# Altium PCB MAIN.PcbDoc
Units mil, origin at the board's own origin, x right, y up, seen from the top; angles counter-clockwise.
Board outline 6000 x 4000 mil, 2 copper layers (Top Layer, Bottom Layer), stack 54.768 mil thick; 110 components, 125 nets, 555 pads, 0 vias.
Unrouted connection lines stored in the file: 226.
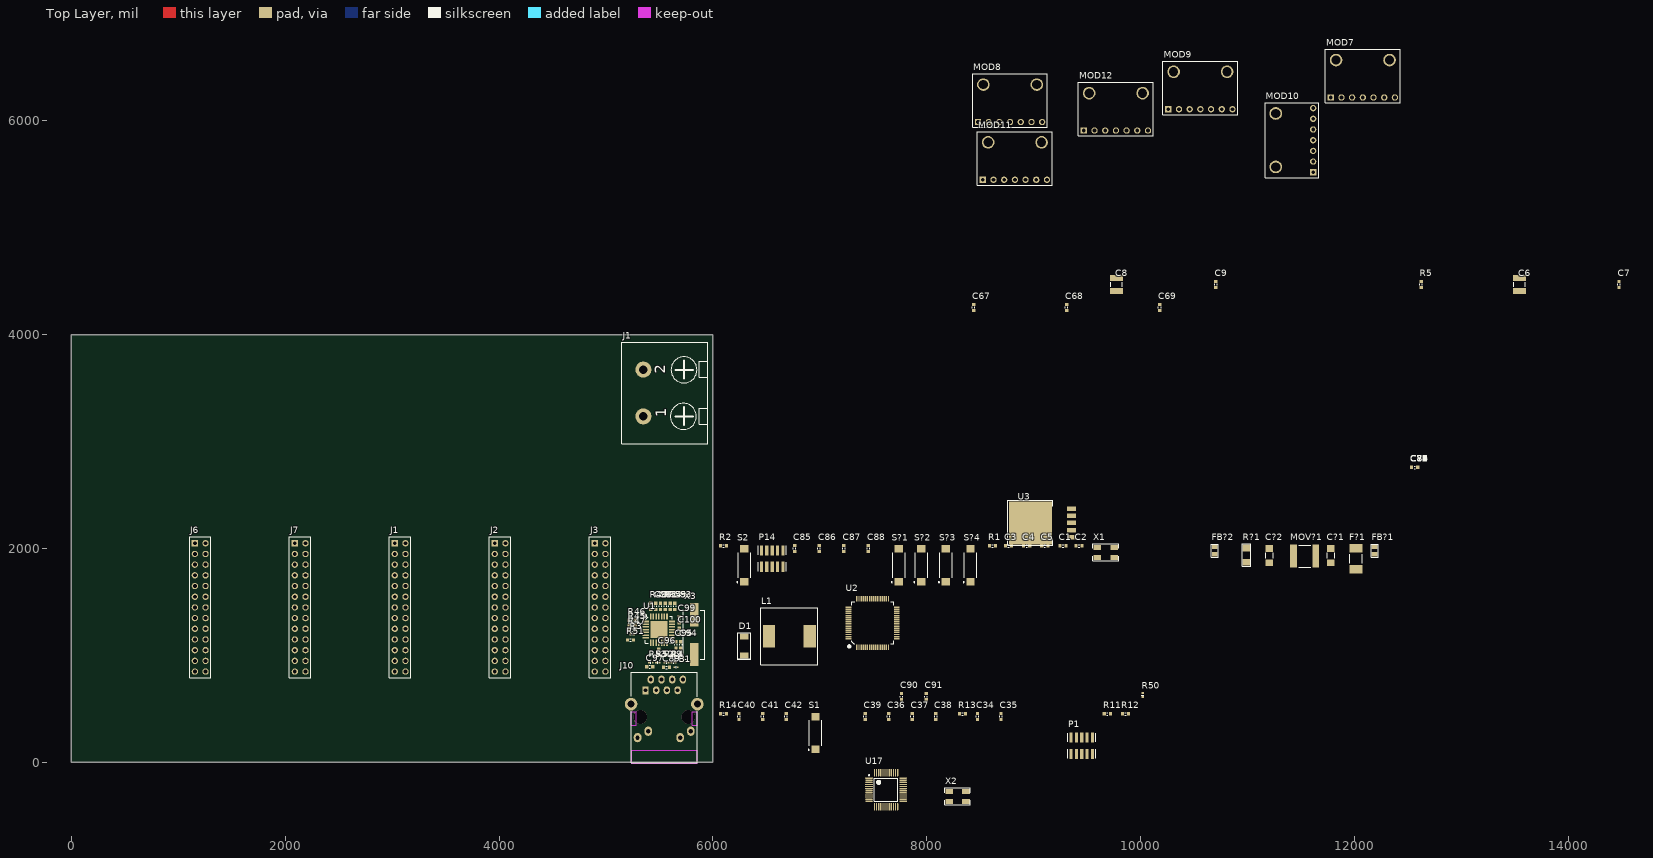
[diagram p0: Top Layer view]
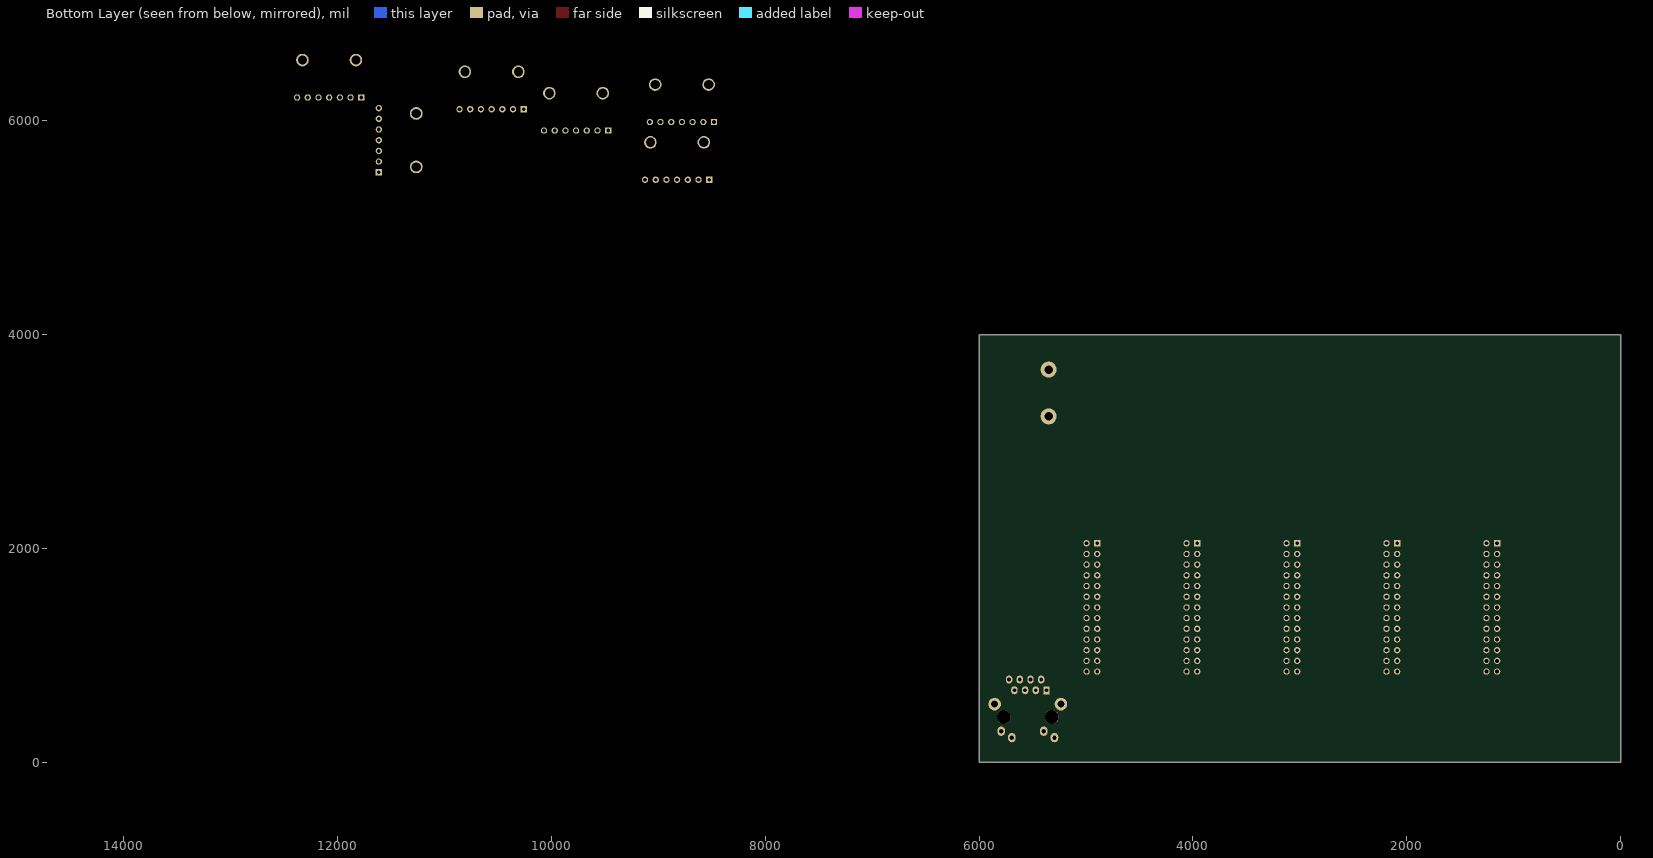
[diagram p1: Bottom Layer view, seen from below]

## Layer stack, top to bottom
Top Solder: solder mask 0.4, Solder Resist, Dk 3.5
Top Layer: signal copper 1.4
Dielectric 1: dielectric 51.9685, FR-4, Dk 4.8
Bottom Layer: signal copper 1.4
Bottom Solder: solder mask 0.4, Solder Resist, Dk 3.5

## Board outline
0,0 6000,0 6000,4000 0,4000

## Design rules (kind name [scope] priority, off if disabled: settings)
Clearance [All] p1: gap=10 ignorepadtopadclearanceinfootprint=FALSE except(0: Arc-Hole Track-Hole SMDPad-Hole THPad-Hole Via-Hole Fill-Hole Poly-Hole Region-Hole Text-Hole)
PolygonConnect [All] p1: connectstyle=Relief reliefconductorwidth=10 reliefentries=4 polygonreliefangle="90 Angle" airgapwidth=10
RoutingVias [All] p1: holewidth=28 width=50 viastyle="Through Hole" minholewidth=28 minwidth=50 maxholewidth=28 maxwidth=50
SolderMaskExpansion [All] p1: expansion=4 istentingtop=FALSE
Width [All] p1: maxlimit=10 minlimit=10 preferedwidth=10
30 further rules are at their usual default settings.

## Classes and differential pairs
component class Designator3: C73 C74 C75 MOD9
channel class VL53L0X: Designator1 Designator2 Designator4 Designator5 Designator6
component class Designator6: C82 C83 C84 MOD12
component class Designator5: C79 C80 C81 MOD11
component class Designator4: C76 C77 C78 MOD10
component class Designator1: C67 C68 C69 MOD7
component class Designator2: C70 C71 C72 MOD8
component class MAIN: C1 C2 C3 C4 C5 C85 C86 C87 C88 C?1 C?2 F?1 FB?1 FB?2 J1 J2 J3 J6 J7 MOV?1 P14 R1 R2 R?1 S2 S?1 S?2 S?3 S?4 U2 X1
component class Designator: C34 C35 C36 C37 C38 C39 C40 C41 C42 P1 R11 R12 R13 R14 S1 U17 X2

## Components (designator, comment, footprint, x,y, rotation, side; value= is the part's Value field where it differs from the comment)
C1 "Ceramic C0G" C_0603_1608 9275,2025 r0 top value=22pF (schematic designator C19)
C2 "Ceramic C0G" C_0603_1608 9425,2025 r0 top value=22pF (schematic designator C20)
C3 "Ceramic X5R" C_0603_1608 8765,2025 r0 top value=4.7uF (schematic designator C21)
C4 "Ceramic X7R" C_0603_1608 8935,2025 r0 top value=100nF (schematic designator C22)
C5 "Ceramic X7R" C_0603_1608 9105,2025 r0 top value=100nF (schematic designator C23)
C6 "Ceramic X5R" C_1210_3225 13545,4470 r90 top value=100uF (schematic designator C50)
C7 "Ceramic X7R" C_0603_1608 14475,4470 r90 top value=100nF (schematic designator C51)
C8 "Ceramic X5R" C_1210_3225 9775,4470 r90 top value=100uF (schematic designator C52)
C9 "Ceramic X7R" C_0603_1608 10705,4470 r90 top value=100nF (schematic designator C53)
C34 "Ceramic C0G" C_0603_1608 8475,430 r90 top value=22pF (schematic designator C10)
C35 "Ceramic C0G" C_0603_1608 8695,430 r90 top value=22pF (schematic designator C11)
C36 "Ceramic X5R" C_0603_1608 7645,430 r90 top value=4.7uF (schematic designator C12)
C37 "Ceramic X7R" C_0603_1608 7865,430 r90 top value=100nF (schematic designator C13)
C38 "Ceramic X7R" C_0603_1608 8085,430 r90 top value=100nF (schematic designator C14)
C39 "Ceramic X7R" C_0603_1608 7425,430 r90 top value=100nF (schematic designator C15)
C40 "Ceramic X5R" C_0603_1608 6245,430 r90 top value=2.2uF (schematic designator C16)
C41 "Ceramic X7R" C_0603_1608 6465,430 r90 top value=100nF (schematic designator C17)
C42 "Ceramic X7R" C_0603_1608 6685,430 r90 top value=100nF (schematic designator C18)
C67 "Ceramic X5R" C_0603_1608 8440,4255 r90 top value=4.7uF (schematic designator C7)
C68 "Ceramic X5R" C_0603_1608 9310,4255 r90 top value=4.7uF (schematic designator C8)
C69 "Ceramic X7R" C_0603_1608 10180,4255 r90 top value=100nF (schematic designator C9)
C70 "Ceramic X5R" C_0603_1608 12564.5,2759.5 r0 top value=4.7uF (schematic designator C7)
C71 "Ceramic X5R" C_0603_1608 12564.5,2759.5 r0 top value=4.7uF (schematic designator C8)
C72 "Ceramic X7R" C_0603_1608 12564.5,2759.5 r0 top value=100nF (schematic designator C9)
C73 "Ceramic X5R" C_0603_1608 12564.5,2759.5 r0 top value=4.7uF (schematic designator C7)
C74 "Ceramic X5R" C_0603_1608 12564.5,2759.5 r0 top value=4.7uF (schematic designator C8)
C75 "Ceramic X7R" C_0603_1608 12564.5,2759.5 r0 top value=100nF (schematic designator C9)
C76 "Ceramic X5R" C_0603_1608 12564.5,2759.5 r0 top value=4.7uF (schematic designator C7)
C77 "Ceramic X5R" C_0603_1608 12564.5,2759.5 r0 top value=4.7uF (schematic designator C8)
C78 "Ceramic X7R" C_0603_1608 12564.5,2759.5 r0 top value=100nF (schematic designator C9)
C79 "Ceramic X5R" C_0603_1608 12564.5,2759.5 r0 top value=4.7uF (schematic designator C7)
C80 "Ceramic X5R" C_0603_1608 12564.5,2759.5 r0 top value=4.7uF (schematic designator C8)
C81 "Ceramic X7R" C_0603_1608 12564.5,2759.5 r0 top value=100nF (schematic designator C9)
C82 "Ceramic X5R" C_0603_1608 12564.5,2759.5 r0 top value=4.7uF (schematic designator C7)
C83 "Ceramic X5R" C_0603_1608 12564.5,2759.5 r0 top value=4.7uF (schematic designator C8)
C84 "Ceramic X7R" C_0603_1608 12564.5,2759.5 r0 top value=100nF (schematic designator C9)
C85 "Ceramic X5R" C_0603_1608 6765,2000 r90 top value=2.2uF (schematic designator C32)
C86 "Ceramic X7R" C_0603_1608 6995,2000 r90 top value=100nF (schematic designator C33)
C87 "Ceramic X7R" C_0603_1608 7225,2000 r90 top value=100nF (schematic designator C34)
C88 "Ceramic X7R" C_0603_1608 7455,2000 r90 top value=100nF (schematic designator C35)
C89 "Ceramic X7R" C_0603_1608 5566.46,890 r180 top value=100nF (schematic designator C36)
C90 "Ceramic X5R" C_0603_1608 7765,615 r90 top value=2.2uF (schematic designator C37)
C91 "Ceramic X7R" C_0603_1608 7995,615 r90 top value=1uF (schematic designator C38)
C92 "Ceramic X7R" C_0603_1608 5510,1460 r90 top value=100nF (schematic designator C39)
C93 "Ceramic X7R" C_0603_1608 5645,1460 r90 top value=100nF (schematic designator C40)
C94 "Ceramic X7R" C_0603_1608 5700,1100 r270 top value=100nF (schematic designator C41)
C95 "Ceramic X7R" C_0603_1608 5655,1100 r270 top value=100nF (schematic designator C42)
C96 "Ceramic X7R" C_0603_1608 5495,1030 r270 top value=100nF (schematic designator C43)
C97 "Ceramic X7R" C_0603_1608 5410,895 r180 top value=100nF (schematic designator C44)
C98 "Ceramic X7T Low ESR and ESL" C_0603_1608 5465,1460 r90 top value=10uF (schematic designator C45)
C99 "Ceramic C0G" C_0603_1608 5685,1333.54 r90 top value=22pF (schematic designator C46)
C100 "Ceramic C0G" C_0603_1608 5685,1226.46 r270 top value=22pF (schematic designator C47)
C?1 "Ceramic C0G" C_1206_3216 11780,1935 r90 top value=220pF (schematic designator C48)
C?2 "Ceramic X7R" C_1206_3216 11205,1935 r90 top value=100nF (schematic designator C49)
D1 "SS14" SMA_DO-214AC 6295,1090 r90 top
F?1 "Fuse" F_SIBA_61x26x26_M 12015,1905 r90 top value=158000.0,5 (schematic designator F1)
FB1 "Ferrite bead" FB_0402_1005 5655.75,890 r180 top value=BLM15EG121SH1D
FB?1 "Ferrite bead" FB_0805_2012 12190,1980 r90 top value=BLM21PG121SZ1D (schematic designator FB2)
FB?2 "Ferrite bead" FB_0805_2012 10695,1980 r90 top value=BLM21PG121SZ1D (schematic designator FB4)
J1 "Goldpin female straight" J_HEADER_2x13_2.54_VERTICAL 3025,2050 r270 top value=DS1023-2*13S21
J1 "600V 30A connector" J_8PCV-02-006 5350,3237 r90 top value=8PCV-02-006 (schematic designator J5)
J2 "Goldpin female straight" J_HEADER_2x13_2.54_VERTICAL 3960,2050 r270 top value=DS1023-2*13S21
J3 "Goldpin female straight" J_HEADER_2x13_2.54_VERTICAL 4895,2050 r270 top value=DS1023-2*13S21
J6 "Goldpin female straight" J_HEADER_2x13_2.54_VERTICAL 1155,2050 r270 top value=DS1023-2*13S21
J7 "Goldpin female straight" J_HEADER_2x13_2.54_VERTICAL 2090,2050 r270 top value=DS1023-2*13S21
J10 "Modular Connectors / Ethernet Connectors 1X1 TAB DOWN 10/100" J00-00XX 5545,425 r180 top value=J00-0065NL (schematic designator J4)
L1 "Inductor" L_SRR1280-XXXY 6715,1180 r0 top value=27uH
MOD7 "time-of-flight" MOD_VL53L0X 12079.5,6419.5 r0 top value="Pololu 2490" (schematic designator MOD2)
MOD8 "time-of-flight" MOD_VL53L0X 8780,6190 r0 top value="Pololu 2490" (schematic designator MOD2)
MOD9 "time-of-flight" MOD_VL53L0X 10560,6310 r0 top value="Pololu 2490" (schematic designator MOD2)
MOD10 "time-of-flight" MOD_VL53L0X 11415,5820 r90 top value="Pololu 2490" (schematic designator MOD2)
MOD11 "time-of-flight" MOD_VL53L0X 8825,5650 r0 top value="Pololu 2490" (schematic designator MOD2)
MOD12 "time-of-flight" MOD_VL53L0X 9770,6110 r0 top value="Pololu 2490" (schematic designator MOD2)
MOV?1 "VC2220K122R025" MOV_2220_5650 11535,1930 r0 top (schematic designator MOV1)
P1 "Jtag" P_HEADER_2x5_1.27 9450,160 r0 top value=20021121-00010C4LF (schematic designator P2)
P14 "Jtag" P_HEADER_2x5_1.27 6555,1910 r0 top value=20021121-00010C4LF (schematic designator P4)
R1 "Resistor" R_0603_1608 8615,2025 r0 top value=10k (schematic designator R10)
R2 "Resistor" R_0603_1608 6100,2025 r0 top value=100k (schematic designator R11)
R3 "Resistor" R_0402_1005 5245,1200 r0 top value=1k (schematic designator R12)
R4 "Resistor" R_0402_1005 5632.72,935 r0 top value=49.9R (schematic designator R13)
R5 "Resistor" R_NC_0603_1608 12625,4470 r90 top value=3k (schematic designator R29)
R11 "Resistor" R_0603_1608 9690,455 r0 top value=4.7k (schematic designator R3)
R12 "Resistor" R_0603_1608 9860,455 r0 top value=4.7k (schematic designator R4)
R13 "Resistor" R_0603_1608 8335,455 r0 top value=10k (schematic designator R8)
R14 "Resistor" R_0603_1608 6100,455 r0 top value=100k (schematic designator R9)
R45 "Resistor" R_0603_1608 5245,1285 r0 top value=1k (schematic designator R14)
R46 "Resistor" R_0603_1608 5245,1330 r0 top value=1k (schematic designator R17)
R47 "Resistor" R_0603_1608 5245,1240 r0 top value=1k (schematic designator R18)
R48 "Resistor" R_0603_1608 5420,1460 r270 top value=1k (schematic designator R19)
R49 "Resistor" R_0402_1005 5567.28,935 r0 top value=49.9R (schematic designator R20)
R50 "Resistor" R_0402_1005 10020,630 r90 top value=2.2k (schematic designator R21)
R51 "Resistor" R_0603_1608 5230,1145 r0 top value=10k (schematic designator R22)
R52 "Resistor" R_0402_1005 5485,935 r0 top value=49.9R (schematic designator R23)
R53 "Resistor" R_0402_1005 5420,935 r0 top value=49.9R (schematic designator R24)
R54 "Resistor" R_0603_1608 5555,1460 r90 top value=1k (schematic designator R25)
R55 "Resistor" R_0603_1608 5600,1460 r90 top value=1k (schematic designator R26)
R?1 "Resistor" R_1206_3216 10990,1940 r90 top value=10R (schematic designator R27)
S1 "3x6mm" S_TACTSWITCH3x6 6960,275 r90 top
S2 "3x6mm" S_TACTSWITCH3x6 6295,1845 r90 top
S?1 "3x6mm" S_TACTSWITCH3x6 7740,1845 r90 top (schematic designator S3)
S?2 "3x6mm" S_TACTSWITCH3x6 7950,1845 r90 top (schematic designator S4)
S?3 "3x6mm" S_TACTSWITCH3x6 8180,1845 r90 top (schematic designator S5)
S?4 "3x6mm" S_TACTSWITCH3x6 8410,1845 r90 top (schematic designator S6)
U1 "Stand-Alone Ethernet Controller with SPI Interface" QFN28_6x6_EP 5495,1242.05 r270 top value=ENC28J60-I/ML (schematic designator U5)
U2 "STM32F405RBT6" LQFP64_10x10 7495,1305 r0 top value=STM32F405RGT6TR (schematic designator U6)
U3 "VR_LM2596" TO-263-6 9000,2240 r90 top (schematic designator U7)
U17 "STM32F103C8T6" LQFP48_7x7 7620,-255 r0 top (schematic designator U4)
X1 "8MHz" X_ABM3B_5X3X11 9675,1965 r0 top (schematic designator X2)
X2 "8MHz" X_ABM3B_5X3X11 8288.74,-317.24 r0 top (schematic designator X1)
X3 "X_GENERIC" X_HC49_SMD 5825,1195 r270 top value=25MHz

## Footprints (in the part's own frame and the unit in brackets; to place one, negate y for a bottom-side part, rotate by r counter-clockwise, add the part's x,y. Pads: shape width x height; smd on the part's side, far side on the other; paste and mask are expansions set on the pad)
C_0603_1608 [mm]
  rect 0.75x0.8 smd: 1(-0.725,0) 2(0.725,0)
  silkscreen extent -0.15,-0.3 0.15,0.3, body extent -0.85,-0.45 0.85,0.45, height 0.89
C_1206_3216 [mil]
  rect 64x70 smd: 1(-67,0) 2(67,0)
  silkscreen extent -25,-35 25,35, body extent -67,-35 67,35, height 39
C_1210_3225 [mil]
  rect 54x120 smd: 1(-60,0) 2(60,0)
  silkscreen extent -20,-55 20,55, body extent -72,-55 70,55, height 86
F_SIBA_61x26x26_M [mm] "Fuse, 2-Leads, Body 6,10x2,60mm, IPC Medium Density"
  rect 2x3.15 smd: 1(-2.45,0) 2(2.45,0)
  silkscreen extent -1.1,-1.5 1.1,1.5, body extent -3.05,-1.3 3.05,1.3, height 2.6
FB_0402_1005 [mm]
  rect 0.45x0.45 smd: 1(-0.4,0) 2(0.4,0)
  silkscreen extent 0,-0.25 0,0.25, body extent -0.52,-0.3 0.52,0.3, height 0.34
FB_0805_2012 [mil]
  rect 42x55 smd: 1(-35,0) 2(35,0)
  silkscreen extent -62,-33 62,33, body extent -43,-29 44,29, height 53
J00-00XX [mm]
  rect 1.525x1.9 hole 0.9: 1(4.445,-6.35)
  oval 1.525x1.9 hole 0.9: 2(3.175,-8.89) 3(1.905,-6.35) 4(0.635,-8.89) 5(-0.635,-6.35) 6(-1.905,-8.89) 7(-3.175,-6.35) 8(-4.445,-8.89)
  oval 1.825x2.2 hole 1.02: 9(6.325,4.902) 10(3.785,3.378) 11(-3.785,4.902) 12(-6.325,3.378)
  round 3.251 hole 3.25 unplated: DNC(-5.715,0) DNC(5.715,0)
  round 3 hole 1.63: MH(-7.874,-3.048) MH(7.874,-3.048)
  Top Layer keep-out region: 7.855,11 -7.855,11 -7.855,8 7.855,8
  Top Layer keep-out lines w0.254: 7.855,2 6.645,2 6.645,-1.25 7.855,-1.25 7.855,2 ; -6.645,2 -7.855,2 -7.855,-1.25 -6.645,-1.25 -6.645,2
  silkscreen extent -7.86,-10.59 7.86,10.85, body extent -10.7,-10.73 10.69,10.85, height 2.61
J_8PCV-02-006 [mil]
  round 150 hole 80: 1(0,0) 2(438,0)
  silkscreen extent -255,-600 695,200, body extent -254,-600 694,200, height 770
J_HEADER_2x13_2.54_VERTICAL [mm] "Connector; Header; 26 Position; Male"
  rect 1.5x1.5 hole 0.9: 1(0,0)
  round 1.5 hole 0.9: 2(0,2.54) 3(2.54,0) 4(2.54,2.54) 5(5.08,0) 6(5.08,2.54) 7(7.62,0) 8(7.62,2.54) 9(10.16,0) 10(10.16,2.54) 11(12.7,0) 12(12.7,2.54) 13(15.24,0) 14(15.24,2.54) 15(17.78,0) 16(17.78,2.54) 17(20.32,0) 18(20.32,2.54) 19(22.86,0) 20(22.86,2.54) 21(25.4,0) 22(25.4,2.54) 23(27.94,0) 24(27.94,2.54) 25(30.48,0) 26(30.48,2.54)
  silkscreen extent -1.52,-1.27 32,3.81, body extent -1.52,-1.27 32,3.81, height 8.6
L_SRR1280-XXXY [mm]
  rect 2.9x5.4 smd: 1(-4.85,0) 2(4.85,0)
  silkscreen extent -6.75,-6.75 6.75,6.75, body extent -6.25,-6.25 6.25,6.25, height 7.51
LQFP48_7x7 [mm] "LQFP, 48-Leads, Body 7x7mm, Pitch 0.5mm, IPC Medium Density"
  oval 1.8x0.3 smd: 1(-4.05,2.75) 2(-4.05,2.25) 3(-4.05,1.75) 4(-4.05,1.25) 5(-4.05,0.75) 6(-4.05,0.25) 7(-4.05,-0.25) 8(-4.05,-0.75) 9(-4.05,-1.25) 10(-4.05,-1.75) 11(-4.05,-2.25) 12(-4.05,-2.75) 25(4.05,-2.75) 26(4.05,-2.25) 27(4.05,-1.75) 28(4.05,-1.25) 29(4.05,-0.75) 30(4.05,-0.25) 31(4.05,0.25) 32(4.05,0.75) 33(4.05,1.25) 34(4.05,1.75) 35(4.05,2.25) 36(4.05,2.75)
  oval 0.3x1.8 smd: 13(-2.75,-4.05) 14(-2.25,-4.05) 15(-1.75,-4.05) 16(-1.25,-4.05) 17(-0.75,-4.05) 18(-0.25,-4.05) 19(0.25,-4.05) 20(0.75,-4.05) 21(1.25,-4.05) 22(1.75,-4.05) 23(2.25,-4.05) 24(2.75,-4.05) 37(2.75,4.05) 38(2.25,4.05) 39(1.75,4.05) 40(1.25,4.05) 41(0.75,4.05) 42(0.25,4.05) 43(-0.25,4.05) 44(-0.75,4.05) 45(-1.25,4.05) 46(-1.75,4.05) 47(-2.25,4.05) 48(-2.75,4.05)
  silkscreen extent -4.17,-2.75 2.75,3.57, body extent -4.5,-4.5 4.5,4.5, height 1.6
LQFP64_10x10 [mm]
  rect 0.343x1.35 smd: 1(-3.75,-5.75) 2(-3.25,-5.75) 3(-2.75,-5.75) 4(-2.25,-5.75) 5(-1.75,-5.75) 6(-1.25,-5.75) 7(-0.75,-5.75) 8(-0.25,-5.75) 9(0.25,-5.75) 10(0.75,-5.75) 11(1.25,-5.75) 12(1.75,-5.75) 13(2.25,-5.75) 14(2.75,-5.75) 15(3.25,-5.75) 16(3.75,-5.75) 33(3.75,5.75) 34(3.25,5.75) 35(2.75,5.75) 36(2.25,5.75) 37(1.75,5.75) 38(1.25,5.75) 39(0.75,5.75) 40(0.25,5.75) 41(-0.25,5.75) 42(-0.75,5.75) 43(-1.25,5.75) 44(-1.75,5.75) 45(-2.25,5.75) 46(-2.75,5.75) 47(-3.25,5.75) 48(-3.75,5.75)
  rect 1.35x0.343 smd: 17(5.75,-3.75) 18(5.75,-3.25) 19(5.75,-2.75) 20(5.75,-2.25) 21(5.75,-1.75) 22(5.75,-1.25) 23(5.75,-0.75) 24(5.75,-0.25) 25(5.75,0.25) 26(5.75,0.75) 27(5.75,1.25) 28(5.75,1.75) 29(5.75,2.25) 30(5.75,2.75) 31(5.75,3.25) 32(5.75,3.75) 49(-5.75,3.75) 50(-5.75,3.25) 51(-5.75,2.75) 52(-5.75,2.25) 53(-5.75,1.75) 54(-5.75,1.25) 55(-5.75,0.75) 56(-5.75,0.25) 57(-5.75,-0.25) 58(-5.75,-0.75) 59(-5.75,-1.25) 60(-5.75,-1.75) 61(-5.75,-2.25) 62(-5.75,-2.75) 63(-5.75,-3.25) 64(-5.75,-3.75)
  silkscreen extent -5.83,-5.83 5,5, body extent -5.98,-6.02 6.02,5.98, height 1.56
MOD_VL53L0X [mm]
  rect 1.5x1.5 hole 0.9: 1(-7.62,-5.08)
  round 1.5 hole 0.9: 2(-5.08,-5.08) 3(-2.54,-5.08) 4(0,-5.08) 5(2.54,-5.08) 6(5.08,-5.08) 7(7.62,-5.08)
  round 3 hole 2.184: DNC(-6.35,3.81) DNC(6.35,3.81)
  silkscreen extent -8.89,-6.35 8.89,6.35, body extent -8.9,-6.35 8.9,6.35, height 8.54
MOV_2220_5650 [mm] "Chip MOV, 2-Leads, Body 5,60x5,00mm, IPC Medium Density"
  rect 1.6x5.4 smd: 1(-2.65,0) 2(2.65,0)
  silkscreen extent -1.45,-2.6 1.45,2.6, body extent -2.85,-2.5 2.85,2.5, height 2.5
P_HEADER_2x5_1.27 [mm]
  rect 0.76x2.4 smd: 1(-2.54,-2.032) 2(-2.54,1.868) 3(-1.27,-2.032) 4(-1.27,1.868) 5(0,-2.032) 6(0,1.868) 7(1.27,-2.032) 8(1.27,1.868) 9(2.54,-2.032) 10(2.54,1.868)
  silkscreen extent -3.3,-3.05 3.3,2.92, body extent -3.17,-2.83 3.18,2.67, height 4.51
QFN28_6x6_EP [mm]
  rect 0.4x1.5 smd: 1(-1.95,-3.1) 2(-1.3,-3.1) 3(-0.65,-3.1) 4(0,-3.1) 5(0.65,-3.1) 6(1.3,-3.1) 7(1.95,-3.1) 15(1.95,3.1) 16(1.3,3.1) 17(0.65,3.1) 18(0,3.1) 19(-0.65,3.1) 20(-1.3,3.1) 21(-1.95,3.1)
  rect 1.5x0.4 smd: 8(3.1,-1.95) 9(3.1,-1.3) 10(3.1,-0.65) 11(3.1,0) 12(3.1,0.65) 13(3.1,1.3) 14(3.1,1.95) 22(-3.1,1.95) 23(-3.1,1.3) 24(-3.1,0.65) 25(-3.1,0) 26(-3.1,-0.65) 27(-3.1,-1.3) 28(-3.1,-1.95)
  rect 4x4 smd: EP1(0,0)
  silkscreen extent -3.55,-3.52 3.2,3.2, body extent -3.17,-3.2 3.21,3.22, height 0.89
R_0402_1005 [mm] "Chip Resistor, 2-Leads, Body 1.00x0.50mm, IPC High Density"
  rect 0.45x0.55 smd: 1(-0.45,0) 2(0.45,0)
  silkscreen extent 0,-0.3 0,0.3, body extent -0.53,-0.28 0.53,0.28, height 0.37
R_0603_1608 [mm]
  rect 0.75x0.8 smd: 1(-0.725,0) 2(0.725,0)
  silkscreen extent -0.15,-0.3 0.15,0.3, body extent -0.87,-0.47 0.88,0.48, height 0.54
R_1206_3216 [mil]
  rect 64x70 smd: 1(-67,0) 2(67,0)
  silkscreen extent -104,-40 104,40, body extent -64,-32 64,32, height 27
R_NC_0603_1608 [mm]
  rect 0.75x0.8 smd: 1(-0.725,0) 2(0.725,0)
  silkscreen extent -0.15,-0.3 0.15,0.3, body extent -0.87,-0.47 0.88,0.48, height 0.54
S_TACTSWITCH3x6 [mm] "SODFL, 2-Leads, Body 3,00x8,00mm, IPC Medium Density"
  rect 1.8x2 smd: 1(-3.9,0) 2(3.9,0)
  silkscreen extent -4.15,-1.5 3,1.77, body extent -4,-1.8 4,1.8, height 2.6
SMA_DO-214AC [mil]
  rect 55x80 smd: 1(-89,0) 2(89,0)
  silkscreen extent -133,-60 122,60, body extent -100,-50 104,52, height 95
TO-263-6 [mil]
  rect 42x85 smd: 1(-134,-356) 2(-67,-356) 3(0,-356) 4(67,-356) 5(134,-356)
  rect 400x400 smd: EP1(0,30)
  silkscreen extent -210,-180 210,240, body extent -197,-396 197,220, height 190
X_ABM3B_5X3X11 [mm]
  rect 1.8x1.2 smd: 1(-2,-1.2) 2(2,-1.2) 3(2,1.2) 4(-2,1.2)
  silkscreen extent -3.05,-2.03 3.05,2.03, body extent -2.62,-1.65 2.38,1.55, height 1.1
X_HC49_SMD [mm] "HC49, 2-Leads"
  rect 5.5x2 smd: 1(-4.75,0) 2(4.75,0)
  silkscreen extent -5.84,-2.54 5.84,2.54, body extent -6.95,-2.5 6.95,2.5, height 4.5

## Part data
C1 C2 C34 C35 C99 C100: library part C_22pF_50V_C0G_0603_5, "Capacitor", dielectric=C0G, Manufacturer=Yageo, Manufacturer Part Number=CC0603JRNPO9BN220, Supplier Part Number 1=CC0603JRNPO9220, Tolerance (%)=5, Voltage=50V, HelpURL=https://datasheet.octopart.com/CC0603JRNPO9BN220-Yageo-datasheet-136957424.pdf, Part Number=C_22pF_50V_C0G_0603_5, SCH_Footprint=0603, Supplier 1=TME, Supplier 2="RS Components", Supplier 3=Farnell, Supplier 4=Mouser, Supplier 5=Digi-Key, Supplier 6=LCSC, Supplier Part Number 3=722005, Supplier Part Number 4=603-CC603JRNPO9BN220, Supplier Part Number 5=311-1062-1-ND
C3 C36 C67 C68 C70 C71 C73 C74 C76 C77 C79 C80 C82 C83: library part C_4.7uF_16V_X5R_0603_10, "Capacitor", dielectric=X5R, Manufacturer=Murata, Manufacturer Part Number=GRM188R61C475KAAJD, Tolerance (%)=10, Voltage=16V, HelpURL=https://datasheet.octopart.com/GRM188R61C475KAAJD-Murata-datasheet-66077093.pdf, Part Number=C_4.7uF_16V_X5R_0603_10, SCH_Footprint=0603, Supplier 1=TME, Supplier 2="RS Components", Supplier 3=Farnell, Supplier 4=Mouser, Supplier 5=Digi-Key, Supplier 6=LCSC, Supplier Part Number 2=884-7264P, Supplier Part Number 3=2611924, Supplier Part Number 4=81-GRM188R61C475KAJD, Supplier Part Number 5=490-10481-2-ND
C4 C5 C7 C9 C37 C38 C39 C41 C42 C86 C87 C88 C92 C93 C94 C95 C96: library part C_100nF_50V_X7R_0603_5, "Capacitor", dielectric=X7R, Manufacturer=Samsung, Manufacturer Part Number=CL10B104JB8NNNC, Tolerance (%)=5, Voltage=50V, HelpURL=http://www.tme.eu/pl/Document/4a42202b32dab16128fe107dd69598cc/samsung-chip-cap.pdf, Part Number=C_100nF_50V_X7R_0603_5, SCH_Footprint=0603, Supplier 1=TME, Supplier 2="RS Components", Supplier 3=Farnell, Supplier 4=Mouser, Supplier 5=Digi-Key, Supplier Part Number 1=CL10B104JB8NNNC
  C4 C5 C37 C38 C39 C41 C42 C86 C87 C88 C92 C93 C94 C95 C96: Supplier 6=LCSC, Supplier Part Number 2=7665455, Supplier Part Number 5=1276-1033-1-ND, Supplier Part Number 6=C24452
C6 C8: library part C_100uF_6.3V_X5R_1210_20, "Capacitor", dielectric=X5R, Manufacturer=TDK, Manufacturer Part Number=C3225X5R0J107M250AC, Tolerance (%)=20, Voltage=6.3V, HelpURL=https://datasheet.octopart.com/C3225X5R0J107M250AC-TDK-datasheet-41194876.pdf, Part Number=C_100uF_6.3V_X5R_1210_20, SCH_Footprint=1210, Supplier 1=TME, Supplier 2="RS Components", Supplier 3=Farnell, Supplier 4=Mouser, Supplier 5=Digi-Key, Supplier Part Number 2=7407685P, Supplier Part Number 3=2522162, Supplier Part Number 4=810-C3225X5R0J107M, Supplier Part Number 5=445-1437-1-ND
C40 C85 C90: library part C_2.2uF_35V_X5R_0603_10, "Capacitor", dielectric=X5R, Manufacturer=Murata, Manufacturer Part Number=GRM188R6YA225KA12D, Tolerance (%)=10, Voltage=35V, HelpURL=https://datasheet.octopart.com/GRM188R6YA225KA12D-Murata-datasheet-66077095.pdf, Part Number=C_2.2uF_35V_X5R_0603_10, SCH_Footprint=0603, Supplier 1=TME, Supplier 2="RS Components", Supplier 3=Farnell, Supplier 4=Mouser, Supplier 5=Digi-Key, Supplier 6=LCSC, Supplier Part Number 2=8151358, Supplier Part Number 3=2611926, Supplier Part Number 4=81-GRM188R6YA225KA2D, Supplier Part Number 5=490-7204-1-ND
C69 C72 C75 C78 C81 C84 C89 C97: library part C_100nF_16V_X7R_0603_10, "Capacitor", dielectric=X7R, Manufacturer=Kemet, Manufacturer Part Number=C0603C104K4RAC7013, Tolerance (%)=10, Voltage=16V, HelpURL=https://pl.mouser.com/datasheet/2/212/KEM_C1002_X7R_SMD-1102033.pdf, Part Number=C_100nF_16V_X7R_0603_10, SCH_Footprint=0603, Supplier 1=TME, Supplier 2="RS Components", Supplier 3=Farnell, Supplier 4=Mouser, Supplier 5=Digi-Key, Supplier 6=LCSC, Supplier Part Number 4=80-C0603C104K4RC7013, Supplier Part Number 5=399-7372-2-ND
C91: library part C_1uF_25V_X7R_0603_10, "Capacitor", dielectric=X7R, Manufacturer=Samsung, Manufacturer Part Number=CL10B105KA8NNNC, Tolerance (%)=10, Voltage=25V, HelpURL=http://www.tme.eu/pl/Document/4a42202b32dab16128fe107dd69598cc/samsung-chip-cap.pdf, Part Number=C_1uF_25V_X7R_0603_10, SCH_Footprint=0603, Supplier 1=TME, Supplier 2="RS Components", Supplier 3=Farnell, Supplier 4=Mouser, Supplier 5=Digi-Key, Supplier 6=LCSC, Supplier Part Number 1=CL10B105KA8NNNC
C98: library part C_10uF_10V_X7T_0603_20, "Capacitor", dielectric=X7T, Manufacturer=Murata, Manufacturer Part Number=GRM188D71A106MA73D, Tolerance (%)=20, Voltage=10V, HelpURL=https://pl.mouser.com/datasheet/2/281/murata_03052018_GRM_Series_1-1310166.pdf, Part Number=C_10uF_10V_X7T_0603_20, SCH_Footprint=0603, Supplier 1=TME, Supplier 2="RS Components", Supplier 3=Farnell, Supplier 4=Mouser, Supplier 5=Digi-Key, Supplier 6=LCSC, Supplier Part Number 2=8151349, Supplier Part Number 3=2611920, Supplier Part Number 4=81-GRM188D71A106MA3D, Supplier Part Number 5=490-7200-1-ND, Supplier Part Number 6=C162270
C?1: library part C_220pF_500V_C0G_1206_5, "Capacitor", dielectric=C0G, Manufacturer=AVX, Manufacturer Part Number=12067A221JAT2A, Tolerance (%)=5, Voltage=500V, HelpURL=http://datasheet.octopart.com/12067A221JAT2A-AVX-datasheet-9883399.pdf, Part Number=C_220pF_500V_C0G_1206_5, SCH_Footprint=1206, Supplier 1=TME, Supplier 2="RS Components", Supplier 3=Farnell, Supplier 4=Mouser, Supplier 5=Digi-Key, Supplier 6=LCSC, Supplier Part Number 2=391022, Supplier Part Number 3=2281102, Supplier Part Number 4=581-12067A221J, Supplier Part Number 5=478-5785-1-ND
C?2: library part C_100nF_100V_X7R_1206_10, "Capacitor", dielectric=X7R, Manufacturer=Samsung, Manufacturer Part Number=CL31B104KCFNNNE, Tolerance (%)=10, Voltage=100V, HelpURL=https://datasheet.octopart.com/CL31B104KCFNNNE-Samsung-datasheet-8331463.pdf, Part Number=C_100nF_100V_X7R_1206_10, SCH_Footprint=1206, Supplier 1=TME, Supplier 2="RS Components", Supplier 3=Farnell, Supplier 4=Mouser, Supplier 5=Digi-Key, Supplier 6=LCSC
D1: library part DS_SS14_1A_40V_SMA, Current=1A, Manufacturer="Fairchild Semiconductor", Voltage=40V, HelpURL=https://www.vishay.com/docs/88746/ss12.pdf, Manufacturer Part Number=SS14, Part Number=DS_SS14_1A_40V_SMA, SCH_Footprint=SMA, Supplier 1=TME, Supplier 2="RS Components", Supplier 3=Farnell, Supplier 4=Mouser, Supplier 5=Digi-Key, Supplier Part Number 4=512-SS14, Supplier Part Number 5=SS14CT
F?1: library part F_500mA_125V_61x26x26, Current=500mA, Manufacturer=Siba, Manufacturer Part Number=158000.0,5, Supplier Part Number 1=BSMD-T0.5A, Voltage=125V, HelpURL=https://www.tme.eu/Document/2b36e94e6d725b87cfb40ef3a8fef910/SIBA-GSS-158000.pdf, Part Number=F_500mA_125V_61x26x26, SCH_Footprint=61x26x26, Supplier 1=TME, Supplier 2="RS Components", Supplier 3=Farnell, Supplier 4=Mouser, Supplier 5=Digi-Key, Supplier 6=LCSC
FB1: library part FB_BLM15EG121SH1D, "Ferrite Bead", Current=1.5A, Manufacturer=Murata, Manufacturer Part Number=BLM15EG121SH1D, Resistance=95mR, HelpURL=http://datasheet.octopart.com/BLM15EG121SH1D-Murata-datasheet-37129980.pdf, Part Number=FB_BLM15EG121SH1D, SCH_Footprint=0402, Supplier 1=TME, Supplier 2="RS Components", Supplier 3=Farnell, Supplier 4=Mouser, Supplier 5=Digi-Key, Supplier 6=LCSC, Supplier Part Number 3=2871614, Supplier Part Number 4=81-BLM15EG121SH1D, Supplier Part Number 5=490-17344-1-ND
FB?1 FB?2: library part FB_BLM21PG121SZ1D, "Ferrite Bead", Current=3A, Manufacturer=Murata, Manufacturer Part Number=BLM21PG121SZ1D, Resistance=30mR, HelpURL=https://datasheet.octopart.com/BLM21PG121SZ1D-Murata-datasheet-138707404.pdf, Part Number=FB_BLM21PG121SZ1D, SCH_Footprint=0805, Supplier 1=TME, Supplier 2="RS Components", Supplier 3=Farnell, Supplier 4=Mouser, Supplier 5=Digi-Key, Supplier 6=LCSC, Supplier Part Number 3=3352923, Supplier Part Number 4=81-BLM21PG121SZ1D, Supplier Part Number 5=490-18101-1-ND
J1 J2 J3 J6 J7: library part J_HEADER_2x13_2.54_VERTICAL, "Pin Header", Manufacturer=Connfly, Manufacturer Part Number=DS1023-2*13S21, HelpURL=https://datasheet.octopart.com/DS1023-2%2A13S21-Connfly-datasheet-81850794.pdf, Part Number=J_HEADER_2x13_2.54_VERTICAL, SCH_Footprint="2x13 2.54mm Vertical", Supplier 1=TME, Supplier 2="RS Components", Supplier 3=Farnell, Supplier 4=Mouser, Supplier 5=Digi-Key, Supplier 6=LCSC, Supplier Part Number 1=DS1023-2*13S21
J1: library part J_8PCV-02-006, "ARK Screw terminal, 2-Pin", Manufacturer="TE Connectivity", Manufacturer Part Number=8PCV-02-006, HelpURL=http://www.mouser.com/ds/2/418/NG_CD_6-1437657-3_K4-669783.pdf, Part Number=J_8PCV-02-006, SCH_Footprint=8PCV-02-006, Supplier 1=TME, Supplier 2="RS Components", Supplier 3=Farnell, Supplier 4=Mouser, Supplier 5=Digi-Key, Supplier 6=LCSC, Supplier Part Number 2=7176637, Supplier Part Number 4=571-514376577, Supplier Part Number 5=A98460-ND
J10: library part J_J00-0065NL, Manufacturer=Pulse, Manufacturer Part Number=J00-0065NL, HelpURL=https://datasheet.octopart.com/J00-0065NL-Pulse-datasheet-7613.pdf, Part Number=J_J00-0065NL, SCH_Footprint=J00-00XX, Supplier 1=TME, Supplier 2="RS Components", Supplier 3=Farnell, Supplier 4=Mouser, Supplier 5=Digi-Key, Supplier 6=LCSC, Supplier Part Number 3=2896134, Supplier Part Number 4=673-J00-0065NL, Supplier Part Number 5=553-1345-ND
L1: library part L_27uH_3.9A_SRR1280, "Induction", Current=3.9A, Manufacturer=Bourns, Manufacturer Part Number=SRR1280-270M, Resistance=52mR, HelpURL=https://www.bourns.com/pdfs/SRR1280.pdf, Part Number=L_27uH_3.9A_SRR1280, SCH_Footprint=12x12, Supplier 1=TME, Supplier 2="RS Components", Supplier 3=Farnell, Supplier 4=Mouser, Supplier 5=Digi-Key, Supplier Part Number 2=8749766P, Supplier Part Number 3=2333859, Supplier Part Number 4=652-SRR1280-270M
MOD7 MOD8 MOD9 MOD10 MOD11 MOD12: library part MOD_VL53L0X, "Pin Header", Manufacturer=Polulu, Manufacturer Part Number="Pololu 2490", HelpURL=https://www.pololu.com/file/download/VL53L0X.pdf?file_id=0J1187, Part Number=MOD_VL53L0X, SCH_Footprint=17.8x12.7mm, Supplier 1=TME, Supplier 2="RS Components", Supplier 3=Farnell, Supplier 4=Mouser, Supplier 5=Digi-Key, Supplier 6=LCSC, Supplier 7=Botland, Supplier Part Number 7=PLL-07176
MOV?1: library part MOV_31VDC_25VAC_2220, "Varistor", Manufacturer=Kemet, Voltage=31VDC/25VAC, HelpURL=http://datasheet.octopart.com/VC2220K501R130-KEMET-datasheet-86450646.pdf, Manufacturer Part Number=VC2220K122R025, Part Number=MOV_31VDC_25VAC_2220, SCH_Footprint=2220, Supplier 1=TME, Supplier 2="RS Components", Supplier 3=Farnell, Supplier 4=Mouser, Supplier 5=Digi-Key, Supplier 6=LCSC, Supplier Part Number 3=2989482, Supplier Part Number 4=80-VC2220K122R025, Supplier Part Number 5=VC2220K122R025-ND
P1 P14: library part P_HEADER_2x5_1.27, "Pin Header", Manufacturer=FCI, Manufacturer Part Number=20021121-00010C4LF, HelpURL=http://www.mouser.com/catalog/645/usd/1591.pdf, Part Number=P_HEADER_2x5_1.27, SCH_Footprint="2x5 1.27mm", Supplier 1=TME, Supplier 2="RS Components", Supplier 3=Farnell, Supplier 4=Mouser, Supplier 5=Digi-Key, Supplier 6=LCSC, Supplier Part Number 1=20021121-00010C4LF, Supplier Part Number 2=794-4584, Supplier Part Number 3=1865279, Supplier Part Number 4=649-202112100010C4LF, Supplier Part Number 5=609-3695-1-ND
R1 R13 R51: library part R_10k_0603_1, Manufacturer=Vishay, Manufacturer Part Number=CRCW060310K0FKTABC, Power=100mW, Tolerance=1%, Voltage=75V, HelpURL=http://www.tme.eu/pl/Document/622e28308c06d160637f2b14751ba16b/Data%20Sheet%20CRCW_BCe3.pdf, Part Number=R_10k_0603_1, SCH_Footprint=0603, Supplier 1=TME, Supplier 2="RS Components", Supplier 3=Farnell, Supplier 4=Mouser, Supplier 5=Digi-Key, Supplier 6=LCSC, Supplier Part Number 1=CRCW060310K0FKTABC, Supplier Part Number 4=667-ERJ-3EKF1002V, Supplier Part Number 5=P10KGCT-ND
R2 R14: library part R_100k_0603_1, Manufacturer=Royalohm, Manufacturer Part Number=0603SAF1003T5E, Power=100mW, Supplier Part Number 1=SMD0603-100K-1%, Tolerance=1%, Voltage=50V, HelpURL=http://www.tme.eu/pl/Document/b315665a56acbc42df513c99b390ad98/ROYALOHM-THICKFILM.pdf, Part Number=R_100k_0603_1, SCH_Footprint=0603, Supplier 1=TME, Supplier 2="RS Components", Supplier 3=Farnell, Supplier 4=Mouser, Supplier 5=Digi-Key, Supplier 6=LCSC, Supplier Part Number 4=667-ERJ-3EKF1003V, Supplier Part Number 5=P100KHCT-ND
R3: library part R_1k_0402_1, Manufacturer=Yageo, Manufacturer Part Number=RC0402FR-071K, Power=63mW, Tolerance=1%, Voltage=50V, HelpURL=http://www.tme.eu/pl/Document/1a2bc76e2be68b3b1670068306778ce6/rc0402yageo.pdf, Part Number=R_1k_0402_1, SCH_Footprint=0402, Supplier 1=TME, Supplier 2="RS Components", Supplier 3=Farnell, Supplier 4=Mouser, Supplier 5=Digi-Key, Supplier 6=LCSC, Supplier Part Number 1=RC0402FR-071K, Supplier Part Number 3=9239235, Supplier Part Number 4=603-RC0402FR-071KP, Supplier Part Number 5=311-1.00KLRCT-ND
R4 R49 R52 R53: library part R_49.9R_0402_1, Manufacturer=Panasonic, Manufacturer Part Number=ERJ-2RKF49R9X, Power=100mW, Tolerance=1%, Voltage=50V, HelpURL=https://datasheet.octopart.com/ERJ-2RKF49R9X-Panasonic-datasheet-13266541.pdf, Part Number=R_49.9R_0402_1, SCH_Footprint=0402, Supplier 1=TME, Supplier 2="RS Components", Supplier 3=Farnell, Supplier 4=Mouser, Supplier 5=Digi-Key, Supplier 6=LCSC, Supplier Part Number 2=812-6611, Supplier Part Number 3=2059109, Supplier Part Number 4=667-ERJ-2RKF49R9X, Supplier Part Number 5=P49.9LCT-ND
R5: library part R_GENERIC_0603, Part Number=R_GENERIC_0603, SCH_Footprint=0603, Supplier 1=TME, Supplier 2="RS Components", Supplier 3=Farnell, Supplier 4=Mouser, Supplier 5=Digi-Key
R11 R12: library part R_4.7k_0603_1, Manufacturer=Yageo, Manufacturer Part Number=RC0603FR-074K7L, Power=100mW, Supplier Part Number 1=RC0603FR-074K7, Tolerance=1%, Voltage=75V, HelpURL=http://www.farnell.com/datasheets/2167052.pdf?_ga=2.156163131.1690599162.1548417389-1379097396.1542296996&_gac=1.18389067.1547230258.Cj0KCQiAmuHhBRD0ARIsAFWyPwhX8HcvXnM3tA0ZBodZLzDIjH2ZxLpjT5LWo9bad_HPRbU8LfPq44UaAhEwEALw_wcB, Part Number=R_4.7k_0603_1, SCH_Footprint=0603, Supplier 1=TME, Supplier 2="RS Components", Supplier 3=Farnell, Supplier 4=Mouser, Supplier 5=Digi-Key, Supplier 6=LCSC, Supplier Part Number 3=9238565, Supplier Part Number 4=603-RC0603FR-074K7L, Supplier Part Number 5=311-4.70KHRCT-ND
R45 R46 R47 R48 R54 R55: library part R_1k_0603_1, Manufacturer=Vishay, Manufacturer Part Number=CRCW06031K00FKEA, Power=100mW, Tolerance=1%, Voltage=75V, HelpURL=http://www.farnell.com/datasheets/2310790.pdf?_ga=2.256888843.1690599162.1548417389-1379097396.1542296996&_gac=1.262631934.1547230258.Cj0KCQiAmuHhBRD0ARIsAFWyPwhX8HcvXnM3tA0ZBodZLzDIjH2ZxLpjT5LWo9bad_HPRbU8LfPq44UaAhEwEALw_wcB, Part Number=R_1k_0603_1, SCH_Footprint=0603, Supplier 1=TME, Supplier 2="RS Components", Supplier 3=Farnell, Supplier 4=Mouser, Supplier 5=Digi-Key, Supplier 6=LCSC, Supplier Part Number 2=678-9875P, Supplier Part Number 3=1469740, Supplier Part Number 4=71-CRCW0603-1.0K-E3, Supplier Part Number 5=541-1.00KHCT-ND
R50: library part R_2.2k_0402_1, Manufacturer=Panasonic, Manufacturer Part Number=ERJ-2RKF2201X, Power=100mW, Tolerance=1%, Voltage=50V, HelpURL=https://datasheet.octopart.com/ERJ-2RKF2201X-Panasonic-datasheet-13266541.pdf, Part Number=R_2.2k_0402_1, SCH_Footprint=0402, Supplier 1=TME, Supplier 2="RS Components", Supplier 3=Farnell, Supplier 4=Mouser, Supplier 5=Digi-Key, Supplier 6=LCSC, Supplier Part Number 2=7325384, Supplier Part Number 3=2397219, Supplier Part Number 4=ERJ-2RKF2201X, Supplier Part Number 5=P2.20KLCT-ND
R?1: library part R_10R_1206_1, Manufacturer=Yageo, Manufacturer Part Number=RC1206FR-0710RL, Power=250mW, Tolerance=1%, Voltage=200V, HelpURL=http://www.farnell.com/datasheets/444357.pdf, Part Number=R_10R_1206_1, SCH_Footprint=1206, Supplier 1=TME, Supplier 2="RS Components", Supplier 3=Farnell, Supplier 4=Mouser, Supplier 5=Digi-Key, Supplier 6=LCSC, Supplier Part Number 3=9236643, Supplier Part Number 4=603-RC1206FR-0710RL, Supplier Part Number 5=311-10.0FRCT-ND
S1 S2 S?1 S?2 S?3 S?4: library part S_TACTSWITCH, "Tact Switch", Manufacturer=Ninigi, Manufacturer Part Number=TACTM-34N-F, HelpURL=http://pl.ninigi.com/product/tactm-34n-f/pdf, Part Number=S_TACTSWITCH, Supplier 1=TME, Supplier 2="RS Components", Supplier 3=Farnell, Supplier 4=Mouser, Supplier 5=Digi-Key, Supplier 6=LCSC, Supplier Part Number 1=TACTM-34N-F
U1: library part U_ENC28J60-I/ML, "Series 3.3 V Stand-Alone Ethernet Controller with SPI Interface", Manufacturer=Microchip, Manufacturer Part Number=ENC28J60-I/ML, HelpURL=https://datasheet.octopart.com/ENC28J60-I/ML-Microchip-datasheet-5428630.pdf, Part Number=U_ENC28J60-I/ML, SCH_Footprint=QFN-28, Supplier 1=TME, Supplier 2="RS Components", Supplier 3=Farnell, Supplier 4=Mouser, Supplier 5=Digi-Key, Supplier 6=LCSC, Supplier Part Number 1=ENC28J60-I/ML, Supplier Part Number 2=6665710, Supplier Part Number 3=1564400, Supplier Part Number 4=579-ENC28J60-I/ML, Supplier Part Number 5=ENC28J60-I/ML-ND, Supplier Part Number 6=C57281
U2: library part UP_STM32F405RGT6TR, Manufacturer=STMicroelectronics, Manufacturer Part Number=STM32F405RGT6TR, HelpURL=https://datasheet.octopart.com/STM32F405RGT6TR-STMicroelectronics-datasheet-12357803.pdf, Part Number=UP_STM32F405RGT6TR, SCH_Footprint=LQFP64, Supplier 1=TME, Supplier 2="RS Components", Supplier 3=Farnell, Supplier 4=Mouser, Supplier 5=Digi-Key, Supplier 6=LCSC, Supplier Part Number 1=STM32F405RGT6TR, Supplier Part Number 2=7926013, Supplier Part Number 3=3129633, Supplier Part Number 4=511-STM32F405RGT6TR, Supplier Part Number 5=497-17432-6-ND
U3: library part VR_LM2596-ADJ, Part Number=VR_LM2596-ADJ, SCH_Footprint=TO-263-6, Supplier 1=TME, Supplier 2="RS Components", Supplier 3=Farnell, Supplier 4=Mouser, Supplier 5=Digi-Key
U17: library part UP_STM32F103C8T6, Manufacturer=STMicroelectronics, HelpURL=https://datasheet.octopart.com/STM32F103C8T6-STMicroelectronics-datasheet-48026265.pdf, Manufacturer Part Number=STM32F103C8T6, Part Number=UP_STM32F103C8T6, SCH_Footprint=LQFP48, Supplier 1=TME, Supplier 2="RS Components", Supplier 3=Farnell, Supplier 4=Mouser, Supplier 5=Digi-Key, Supplier 6=LCSC, Supplier Part Number 1=STM32F103C8T6, Supplier Part Number 2=1023545, Supplier Part Number 3=1447637, Supplier Part Number 4=511-STM32F103C8T6, Supplier Part Number 5=497-6063-ND
X1 X2: library part X_ABM3B-8.000MHZ-B2-T, Manufacturer=Abracon, Manufacturer Part Number=ABM3B-8.000MHZ-B2-T, Supplier Part Number 1=ABM3B-8.000MHZ-B2, HelpURL=https://datasheet.octopart.com/ABM3B-8.000MHZ-B2-T-Abracon-datasheet-12510201.pdf, Part Number=X_ABM3B-8.000MHZ-B2-T, SCH_Footprint=5x3.2mm, Supplier 1=TME, Supplier 2="RS Components", Supplier 3=Farnell, Supplier 4=Mouser, Supplier 5=Digi-Key, Supplier 6=LCSC, Supplier Part Number 2=171-0644, Supplier Part Number 3=2467818, Supplier Part Number 4=815-ABM3B-8.0-B2-T, Supplier Part Number 5=535-9720-1-ND
X3: library part ABLS-25.000MHZ-B4-F-T, "Resonator Ceramic", Manufacturer=Abracon, HelpURL=https://datasheet.octopart.com/ABLS-25.000MHZ-B4-F-T-Abracon-datasheet-37142362.pdf, Manufacturer Part Number=ABLS-25.000MHZ-B4-F-T, Part Number=ABLS-25.000MHZ-B4-F-T, SCH_Footprint="HC49 SMD", Supplier 1=TME, Supplier 2="RS Components", Supplier 3=Farnell, Supplier 4=Mouser, Supplier 5=Digi-Key, Supplier 6=LCSC

## Nets (pads, with @x,y where several pads share a name; then routed paths per layer and width w, separated by ;. In a path a pad name is that pad's centre, name@x,y a point inside that pad or via, vN(x,y) a via of type N, cw(c..) or ccw(c..) an arc to the next point about the centre after c; other vN are vias at no path point)
+3.3V: C3.1 C4.1 C5.1 C36.1 C37.1 C38.1 C40.1 C41.1 C42.1 C85.1 C86.1 C87.1 J1.5 J1.6 J2.5 J2.6 J3.5 J3.6 J6.5 J6.6 J7.5 J7.6 P1.1 P14.1 R1.1 R13.1 U2.1 U2.13 U2.19 U2.32 U2.48 U2.64 U17.1 U17.9 U17.24 U17.36 U17.48
+5.0V: J6.11 J6.12 J7.11 J7.12
+12.0V: J1.1@3025,2050 J1.2@3125,2050 J1.3 J1.4 J2.1 J2.2 J2.3 J2.4 J3.1 J3.2 J3.3 J3.4 J6.1 J6.2 J6.3 J6.4 J7.1 J7.2 J7.3 J7.4
DIAG1: J1.18
DIAG2: J1.12
DIAG3: J2.18
DIAG4: J2.12
DIAG5: J3.18
DIAG6: J3.12
DIR1: J1.20
DIR2: J1.13
DIR3: J2.20
DIR4: J2.13
DIR5: J3.20
DIR6: J3.13
ENABLE1: J1.17
ENABLE2: J1.11
ENABLE3: J2.17
ENABLE4: J2.11
ENABLE5: J3.17
ENABLE6: J3.11
ENC_RES: R51.2 U1.6
FB1: J1.23
FB2: J1.24
FB3: J2.23
FB4: J2.24
FB5: J3.23
FB6: J3.24
GND: C1.2 C2.2 C3.2 C4.2 C5.2 C6.2 C7.2 C8.2 C9.2 C34.2 C35.2 C36.2 C37.2 C38.2 C39.2 C40.2 C41.2 C42.2 C67.2 C68.2 C69.2 C70.2 C71.2 C72.2 C73.2 C74.2 C75.2 C76.2 C77.2 C78.2 C79.2 C80.2 C81.2 C82.2 C83.2 C84.2 C85.2 C86.2 C87.2 C88.2 C89.2 C90.2 C91.2 C92.2 C93.2 C94.2 C95.2 C96.2 C97.2 C98.2 C99.2 C100.2 D1.2 J1.7 J1.8 J1.9 J1.10 J2.7 J2.8 J2.9 J2.10 J3.7 J3.8 J3.9 J3.10 J6.7 J6.8 J6.9 J6.10 J7.7 J7.8 J7.9 J7.10 J10.8 J10.10 J10.11 J10.MH MOD7.3 MOD8.3 MOD9.3 MOD10.3 MOD11.3 MOD12.3 P1.9 P14.9 R2.1 R5.1 R14.1 R50.1 S1.2 S2.2 S?1.2 S?2.2 S?3.2 S?4.2 U2.12 U2.18 U2.63 U3.3 U3.5 U3.EP1 U17.8 U17.23 U17.35 U17.47 X1.2 X1.4 X2.2 X2.4
GPIO1_Designator1: MOD7.7
GPIO1_Designator2: MOD8.7
GPIO1_Designator3: MOD9.7
GPIO1_Designator4: MOD10.7
GPIO1_Designator5: MOD11.7
GPIO1_Designator6: MOD12.7
LEDA: R54.1 U1.23
LEDB: R55.1 U1.22
NetC1_1: C1.1 U2.6 X1.3
NetC2_1: C2.1 U2.5 X1.1
NetC6_1: C6.1 C7.1 U3.1
NetC8_1: C8.1 C9.1 L1.2
NetC34_1: C34.1 U17.6 X2.3
NetC35_1: C35.1 U17.5 X2.1
NetC67_1: C67.1 C68.1 C69.1 MOD7.2
NetC70_1: C70.1 C71.1 C72.1 MOD8.2
NetC73_1: C73.1 C74.1 C75.1 MOD9.2
NetC76_1: C76.1 C77.1 C78.1 MOD10.2
NetC79_1: C79.1 C80.1 C81.1 MOD11.2
NetC82_1: C82.1 C83.1 C84.1 MOD12.2
NetC89_1: C89.1 FB1.2 J10.4 R4.1 R49.2
NetC97_1: C97.1 J10.5 R52.1 R53.2
NetC98_1: C98.1 U1.25
NetD1_1: D1.1 L1.1 U3.2
NetJ10_9: J10.9 R54.2
NetJ10_12: J10.12 R55.2
NetR2_2: R2.2 U2.60
NetR3_1: R3.1
NetR3_2: R3.2 U1.5
NetR5_2: R5.2 U3.4
NetR14_2: R14.2 U17.44
NetR45_1: R45.1
NetR45_2: R45.2 U1.3
NetR46_1: R46.1
NetR46_2: R46.2 U1.2
NetR47_1: R47.1
NetR47_2: R47.2 U1.4
NetR48_1: R48.1
NetR48_2: R48.2 U1.28
NetR50_2: R50.2 U1.10
OSC1: C100.1 U1.19 X3.2
OSC2: C99.1 U1.20 X3.1
R\E\S\E\T\: C39.1 R13.2 S1.1 U17.7
RX1: J1.22
RX2: J1.16
RX3: J2.22
RX4: J2.16
RX5: J3.22
RX6: J3.16
SCL_Designator1: MOD7.5
SCL_Designator2: MOD8.5
SCL_Designator3: MOD9.5
SCL_Designator4: MOD10.5
SCL_Designator5: MOD11.5
SCL_Designator6: MOD12.5
SDA_Designator1: MOD7.4
SDA_Designator2: MOD8.4
SDA_Designator3: MOD9.4
SDA_Designator4: MOD10.4
SDA_Designator5: MOD11.4
SDA_Designator6: MOD12.4
SERVO1: J1.25
SERVO2: J1.26
SERVO3: J2.25
SERVO4: J2.26
SERVO5: J3.25
SERVO6: J3.26
STEP1: J1.19
STEP2: J1.14
STEP3: J2.19
STEP4: J2.14
STEP5: J3.19
STEP6: J3.14
TPIN+: J10.3 R52.2 U1.9
TPIN-: J10.6 R53.1 U1.8
TPOUT+: J10.1 R4.2 U1.13
TPOUT-: J10.2 R49.1 U1.12
TX1: J1.21
TX2: J1.15
TX3: J2.21
TX4: J2.15
TX5: J3.21
TX6: J3.15
USART1_DE: J6.24 J7.24
USART1_RX: J6.22 J7.22
USART1_TX: J6.26 J7.26
USART2_DE: J6.18 J7.18
USART2_RX: P1.5
USART2_TX: P1.3
VCC: C90.1 C91.1 C92.1 C93.1 C94.1 C95.1 C96.1 FB1.1 R51.1 U1.11 U1.15 U1.16 U1.21 U1.24
XSHUT_Designator1: MOD7.6
XSHUT_Designator2: MOD8.6
XSHUT_Designator3: MOD9.6
XSHUT_Designator4: MOD10.6
XSHUT_Designator5: MOD11.6
XSHUT_Designator6: MOD12.6
pads on no net: C88.1 C?1.1 C?1.2 C?2.1 C?2.2 F?1.1 F?1.2 FB?1.1 FB?1.2 FB?2.1 FB?2.2 J1.1@5350,3237 J1.2@5350,3675 J6.13 J6.14 J6.15 J6.16 J6.17 J6.19 J6.20 J6.21 J6.23 J6.25 J7.13 J7.14 J7.15 J7.16 J7.17 J7.19 J7.20 J7.21 J7.23 J7.25 J10.7 J10.DNC MOD7.1 MOD7.DNC MOD8.1 MOD8.DNC MOD9.1 MOD9.DNC MOD10.1 MOD10.DNC MOD11.1 MOD11.DNC MOD12.1 MOD12.DNC MOV?1.1 MOV?1.2 P1.2 P1.4 P1.6 P1.7 P1.8 P1.10 P14.2 P14.3 P14.4 P14.5 P14.6 P14.7 P14.8 P14.10 R1.2 R11.1 R11.2 R12.1 R12.2 R?1.1 R?1.2 S2.1 S?1.1 S?2.1 S?3.1 S?4.1 U1.1 U1.7 U1.14 U1.17 U1.18 U1.26 U1.27 U1.EP1 U2.2 U2.3 U2.4 U2.7 U2.8 U2.9 U2.10 U2.11 U2.14 U2.15 U2.16 U2.17 U2.20 U2.21 U2.22 U2.23 U2.24 U2.25 U2.26 U2.27 U2.28 U2.29 U2.30 U2.31 U2.33 U2.34 U2.35 U2.36 U2.37 U2.38 U2.39 U2.40 U2.41 U2.42 U2.43 U2.44 U2.45 U2.46 U2.47 U2.49 U2.50 U2.51 U2.52 U2.53 U2.54 U2.55 U2.56 U2.57 U2.58 U2.59 U2.61 U2.62 U17.2 U17.3 U17.4 U17.10 U17.11 U17.12 U17.13 U17.14 U17.15 U17.16 U17.17 U17.18 U17.19 U17.20 U17.21 U17.22 U17.25 U17.26 U17.27 U17.28 U17.29 U17.30 U17.31 U17.32 U17.33 U17.34 U17.37 U17.38 U17.39 U17.40 U17.41 U17.42 U17.43 U17.45 U17.46

## Text inside footprints (layer, text, board x,y; h text height)
J1: Top Overlay "1" at 5565,3227 h100 r90; Top Overlay "2" at 5555,3637 h100 r90
U3: Mechanical 17 "d" at 9005,2150 h15 r90; Mechanical 19 "-" at 9005,2150 h15 r90